# Altium PCB MB1364.PcbDoc (part 1 of 3)
Units mm, origin at the board's own origin, x right, y up, seen from the top; angles counter-clockwise.
Board outline 70 x 133.34 mm, 6 copper layers (Top Layer, Signal Layer 1, Signal Layer 2, Signal Layer 3, Signal Layer 4, Bottom Layer), stack 1.57 mm thick; 66 components, 167 nets, 440 pads, 46 vias.
Unrouted connection lines stored in the file: 1.
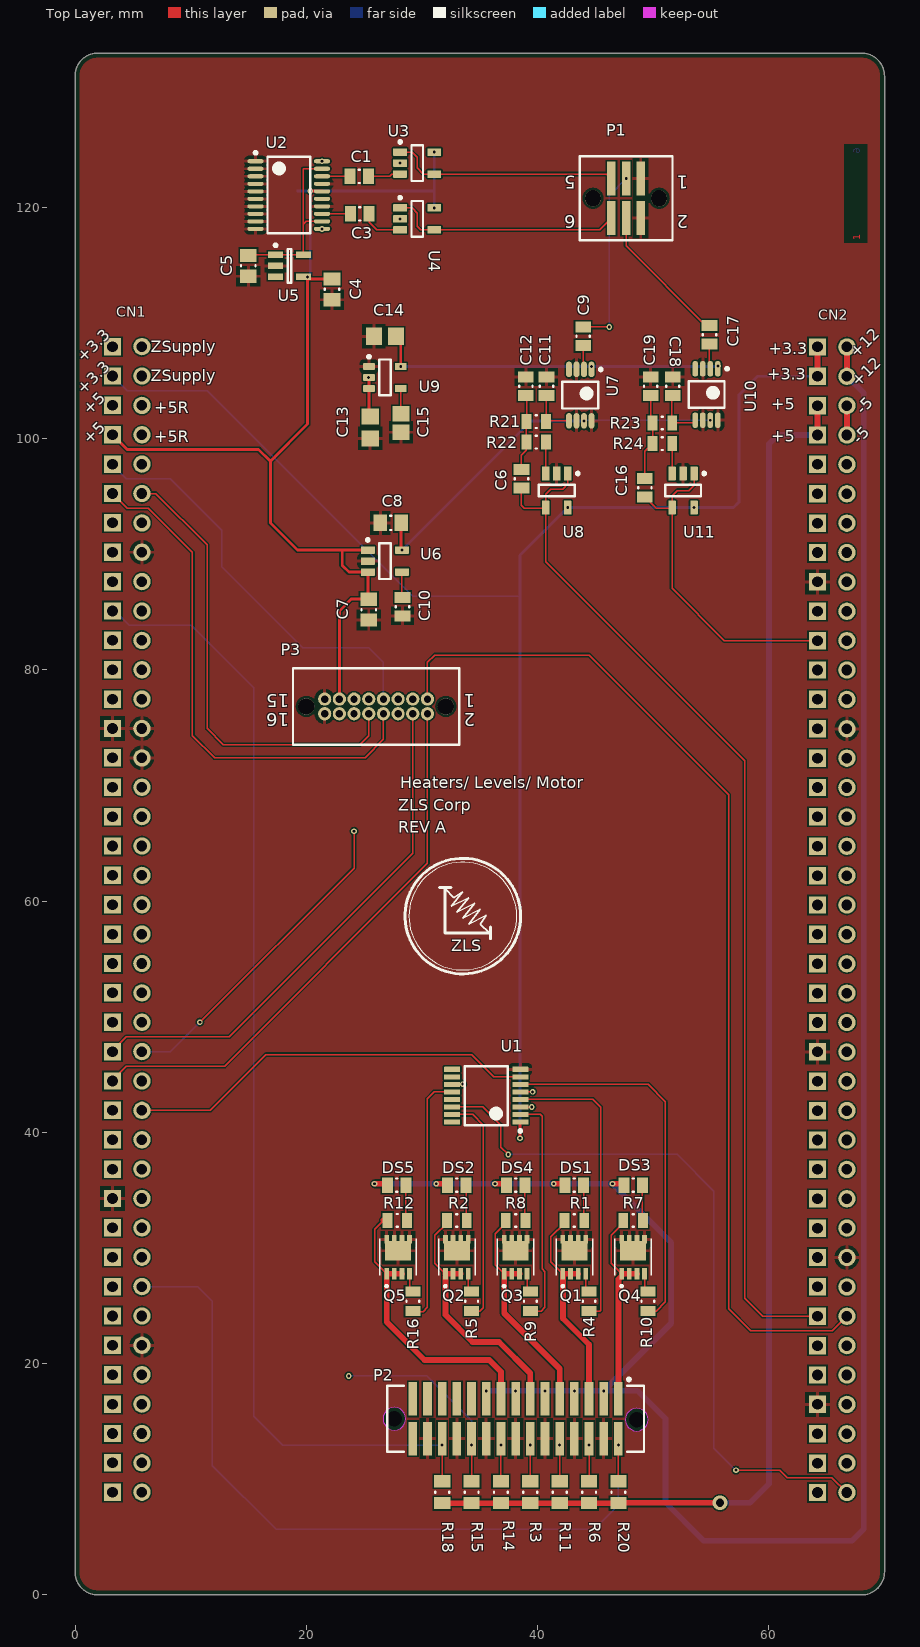
[diagram p0: Top Layer view]
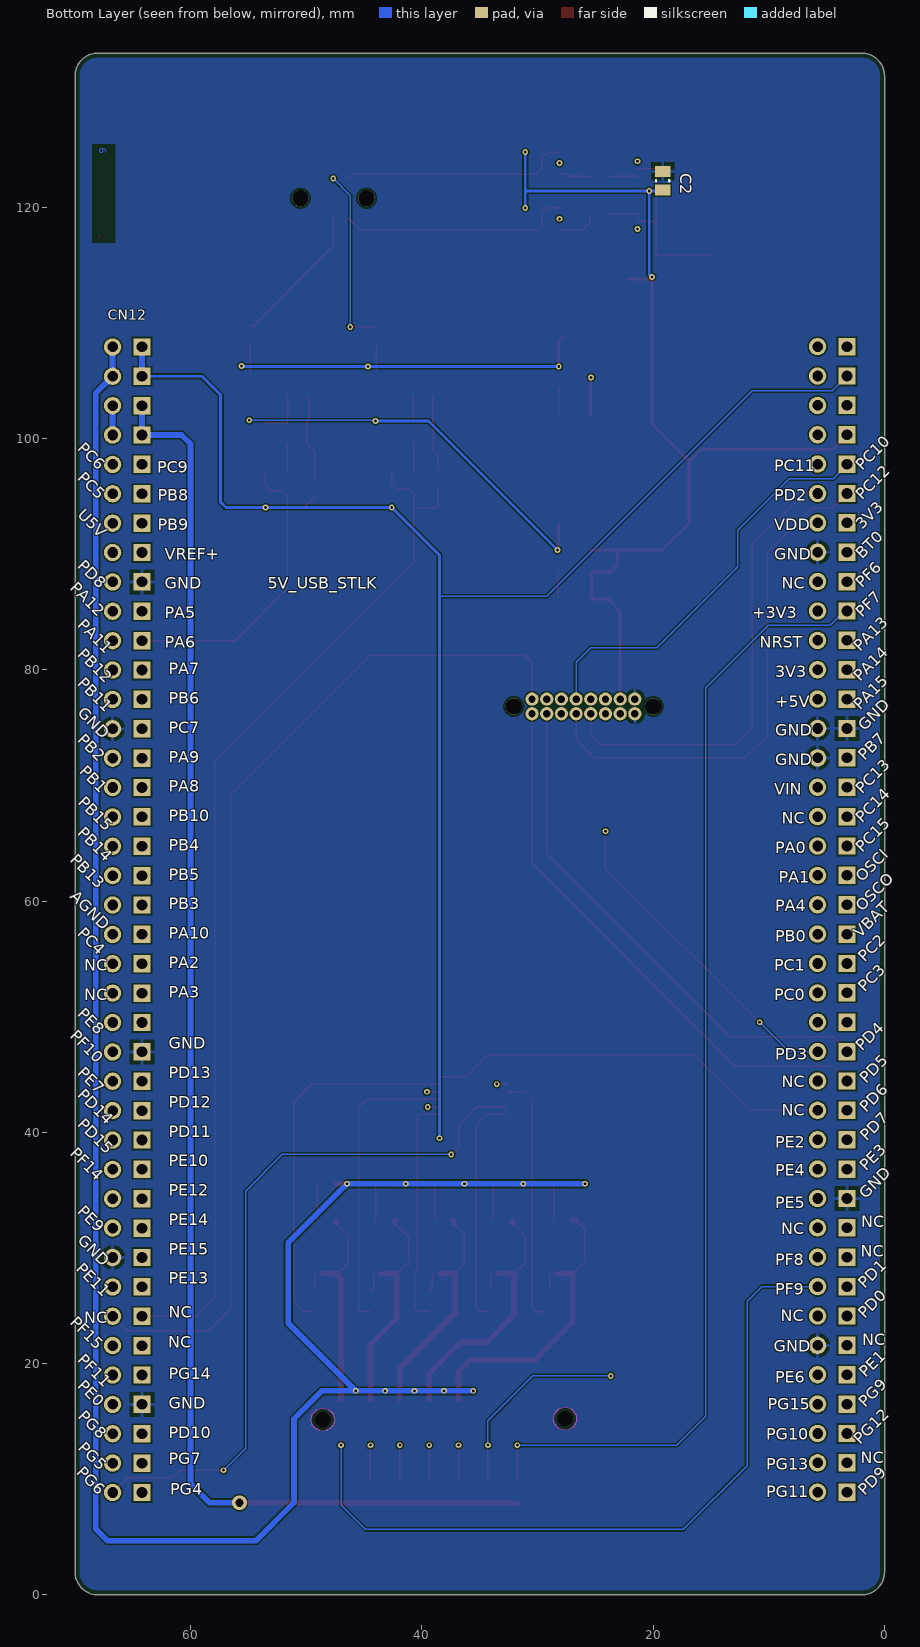
[diagram p1: Bottom Layer view, seen from below]
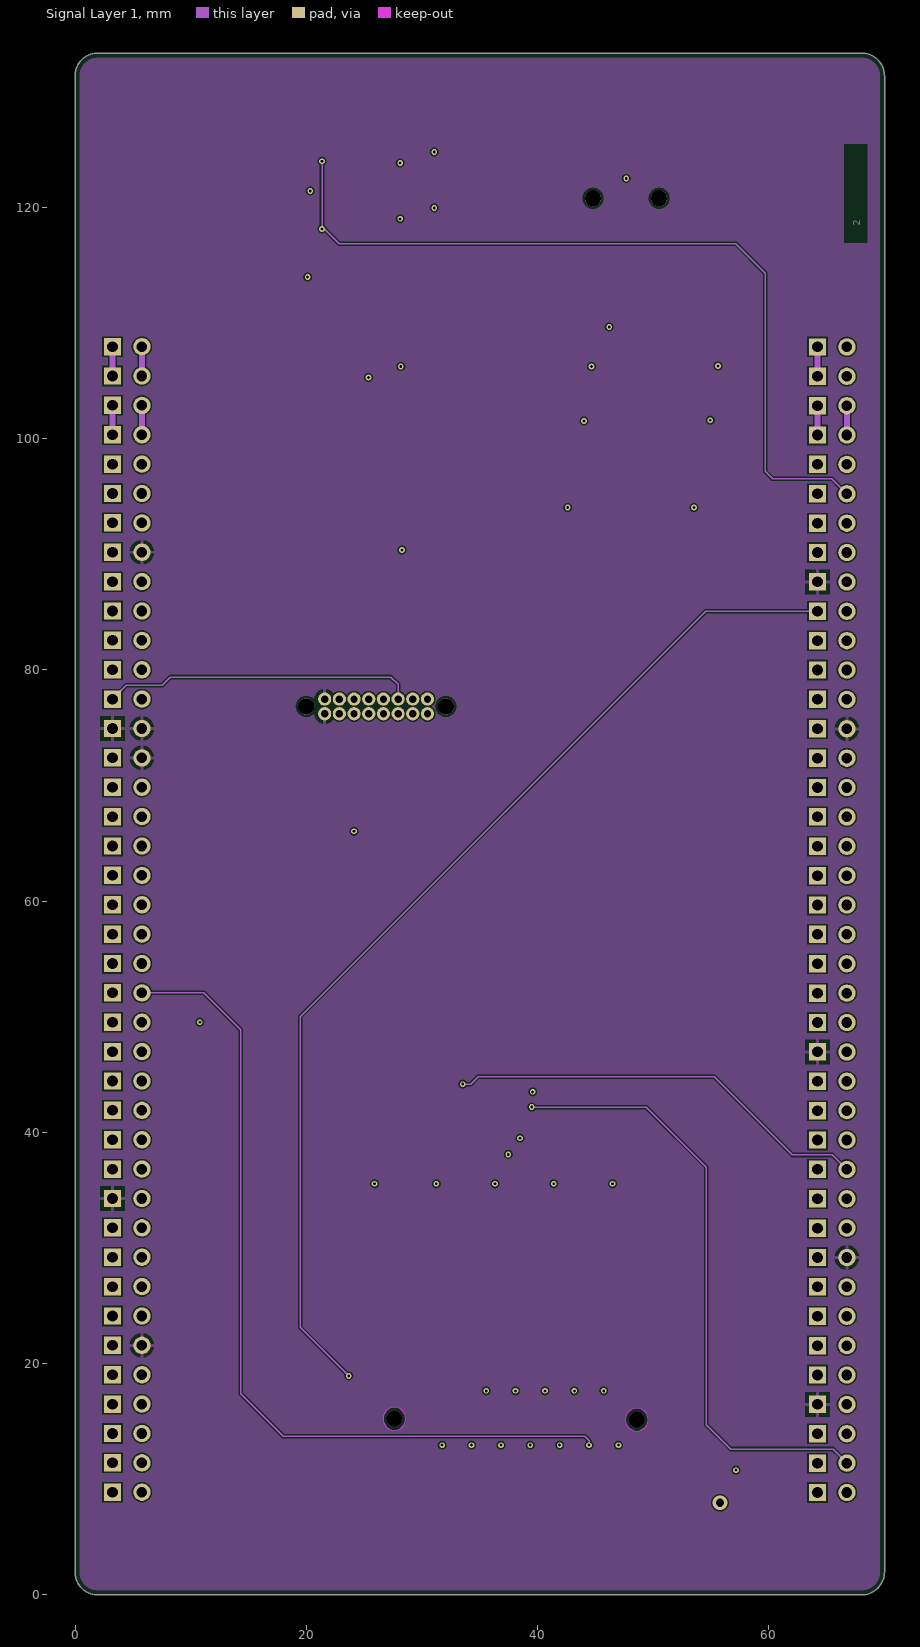
[diagram p2: Signal Layer 1]
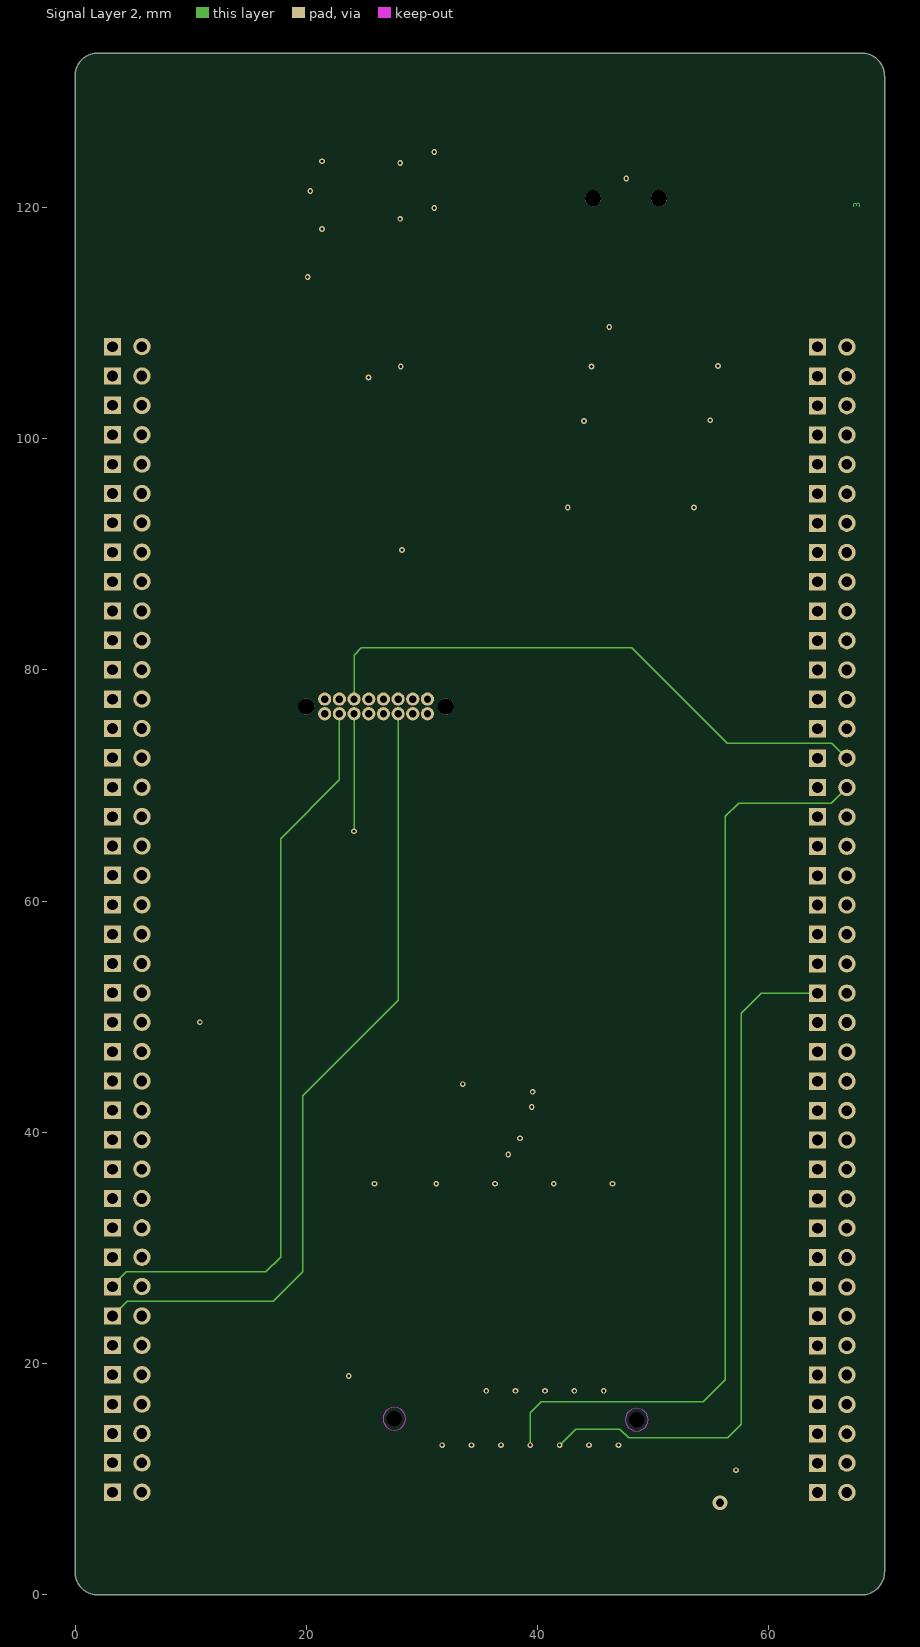
[diagram p3: Signal Layer 2]
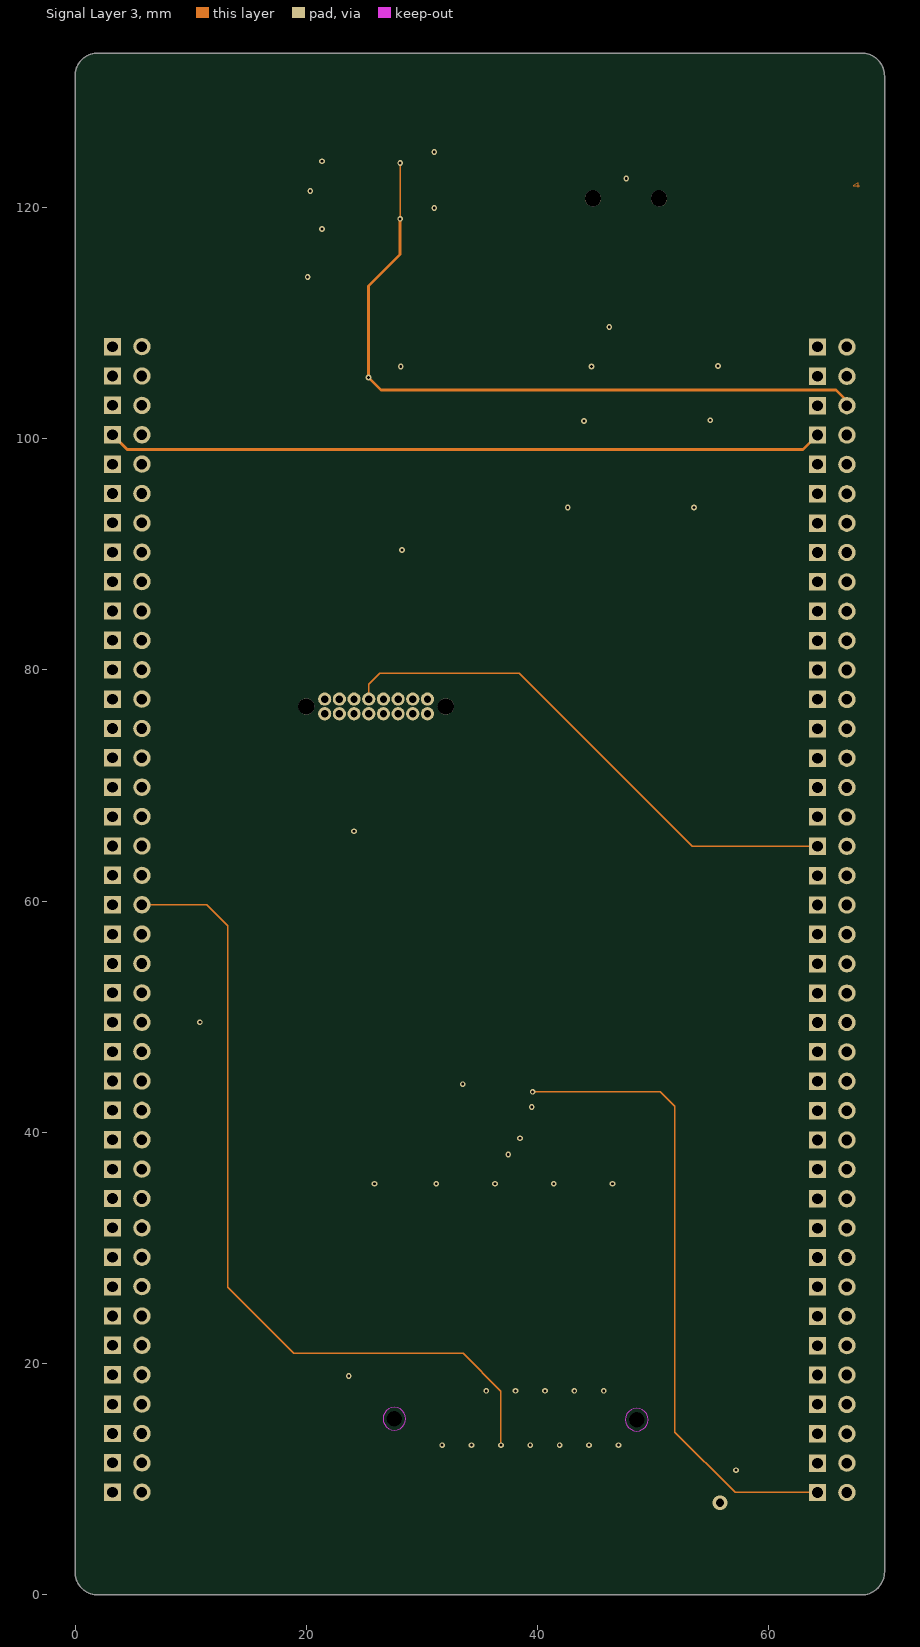
[diagram p4: Signal Layer 3]
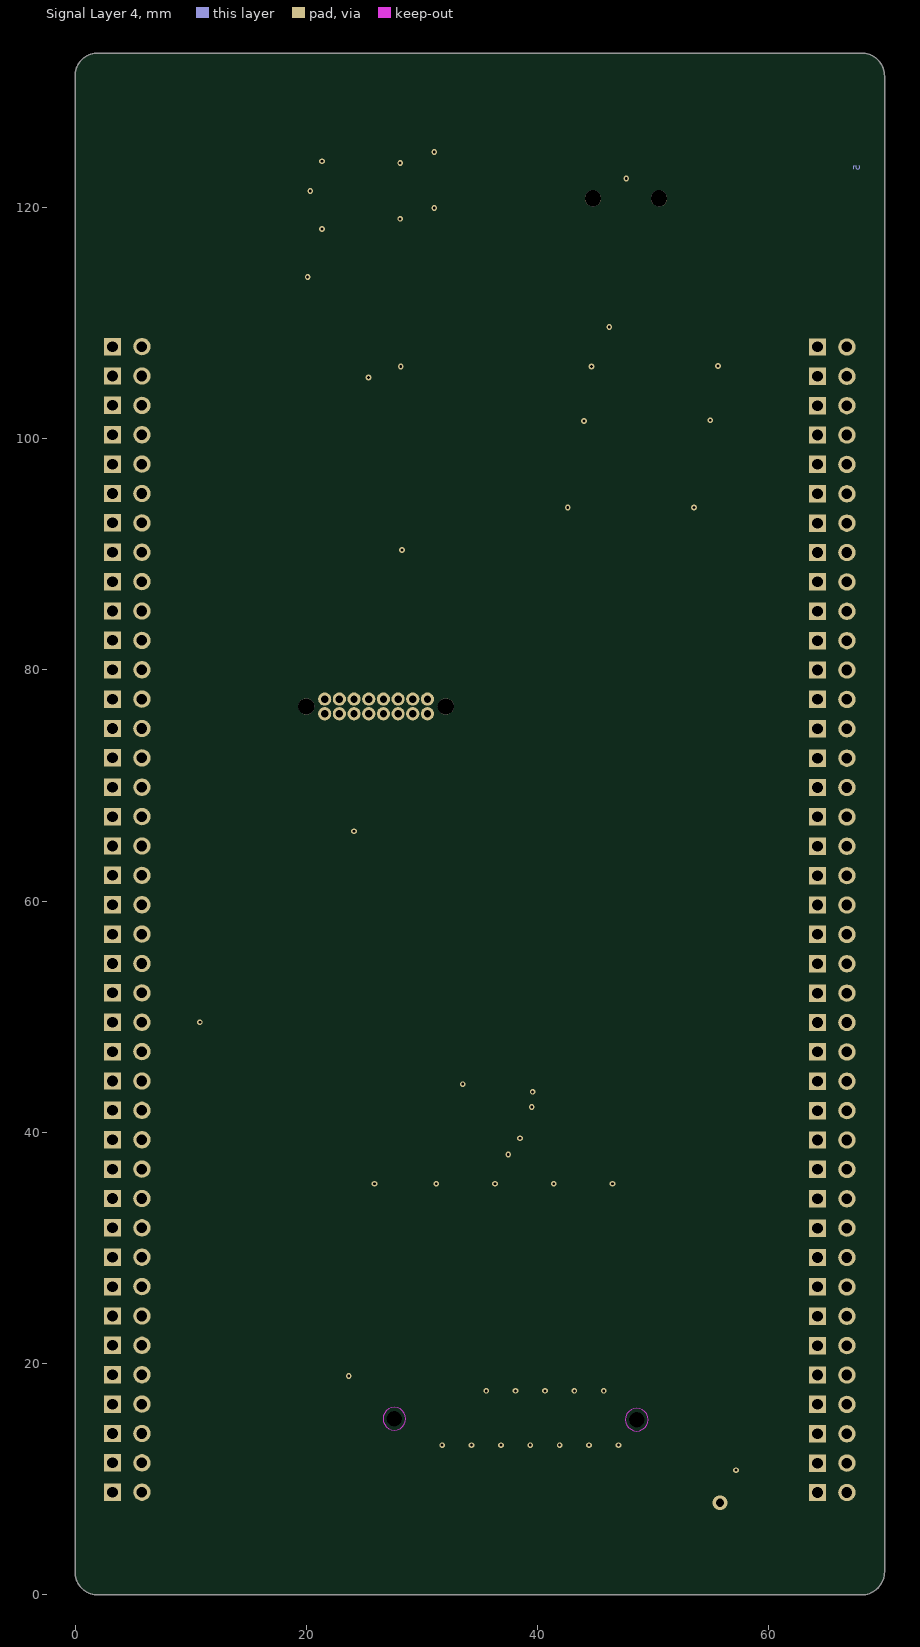
[diagram p5: Signal Layer 4]

## Layer stack, top to bottom
Top Solder: solder mask 0.015, Solder Resist, Dk 3.5
Top Layer: signal copper 0.042
Dielectric 1: prepreg 0.0991, FR-4, Dk 4.2
Signal Layer 1: signal copper 0.0348
Dielectric 2: core 0.1016, Dk 4.2
Signal Layer 2: signal copper 0.0348
Dielectric 3: prepreg 0.9457, Dk 4.2
Signal Layer 3: signal copper 0.0348
Dielectric 4: core 0.1016, Dk 4.2
Signal Layer 4: signal copper 0.0348
Dielectric 5: prepreg 0.0991, Dk 4.2
Bottom Layer: signal copper 0.042
Bottom Solder: solder mask 0.015, Solder Resist, Dk 3.5

## Board outline
0,2 ccw(c2,2) 2,0 37.369,0 51.369,0 68,0 ccw(c68,2) 70,2 70,131.34 ccw(c68,131.34) 68,133.34 2,133.34 ccw(c2,131.34) 0,131.34

## Design rules (kind name [scope] priority, off if disabled: settings)
BoardOutlineClearance [All] p1: gap=0.4 ignorepadtopadclearanceinfootprint=FALSE
Clearance Clearance_RMII_SINGLE_50R [InNetClass('NC_RMII_SINGLE_50R')] p1: gap=0.12 ignorepadtopadclearanceinfootprint=TRUE except(0.2: Arc-Hole Track-Hole SMDPad-SMDPad SMDPad-THPad SMDPad-Hole THPad-THPad THPad-Hole Via-Via Via-Hole Fill-Hole Poly-Hole Region-Hole Text-Hole; 0.3: Arc-Fill Arc-Poly Track-Track Track-Fill Track-Poly SMDPad-Fill SMDPad-Poly THPad-Fill THPad-Poly Via-Fill Via-Poly Fill-Fill Fill-Poly Poly-Poly)
Clearance Clearance_VCP_ISO300 [InNetClass('NC_VCP_ISO300')] p2: gap=0.12 ignorepadtopadclearanceinfootprint=TRUE except(0.2: Arc-Hole Track-Hole SMDPad-SMDPad SMDPad-THPad SMDPad-Hole THPad-THPad THPad-Hole Via-Via Via-Hole Fill-Hole Poly-Hole Region-Hole Text-Hole; 0.3: Arc-Fill Arc-Poly Track-Track Track-Fill Track-Poly SMDPad-Fill SMDPad-Poly THPad-Fill THPad-Poly Via-Fill Via-Poly Fill-Fill Fill-Poly Poly-Poly)
Clearance Clearance_USB_DIFF_90R [InNetClass('NC_USB_DIFF_90R')] p3: gap=0.12 ignorepadtopadclearanceinfootprint=TRUE except(0.2: Arc-Hole Track-Hole SMDPad-SMDPad SMDPad-THPad SMDPad-Hole THPad-THPad THPad-Hole Via-Via Via-Hole Fill-Hole Poly-Hole Region-Hole Text-Hole; 0.3: Arc-Fill Arc-Poly Track-Fill Track-Poly SMDPad-Fill SMDPad-Poly THPad-Fill THPad-Poly Via-Fill Via-Poly Fill-Fill Fill-Poly Poly-Poly)
Clearance Clearance_USB_DIFF_90R_OPTION [InNetClass('NC_USB_DIFF_90R_OPTION') vs OnLayer('Top Layer')] p4: gap=0.12 ignorepadtopadclearanceinfootprint=TRUE except(0.2: Arc-Hole Track-Hole SMDPad-SMDPad SMDPad-THPad SMDPad-Hole THPad-THPad THPad-Hole Via-Via Via-Hole Fill-Hole Poly-Hole Region-Hole Text-Hole; 0.226: Track-Track; 0.3: Arc-Fill Arc-Poly Track-Fill Track-Poly SMDPad-Fill SMDPad-Poly THPad-Fill THPad-Poly Via-Fill Via-Poly Fill-Fill Fill-Poly Poly-Poly)
Clearance Clearance_USB_DIFF_90R_OPTION_L3 [InNetClass('NC_USB_DIFF_90R_OPTION') vs OnLayer('Signal Layer 2')] p5: gap=0.12 ignorepadtopadclearanceinfootprint=TRUE except(0.17: Track-Track; 0.2: Arc-Hole Track-Hole SMDPad-SMDPad SMDPad-THPad SMDPad-Hole THPad-THPad THPad-Hole Via-Via Via-Hole Fill-Hole Poly-Hole Region-Hole Text-Hole; 0.3: Arc-Fill Arc-Poly Track-Fill Track-Poly SMDPad-Fill SMDPad-Poly THPad-Fill THPad-Poly Via-Fill Via-Poly Fill-Fill Fill-Poly Poly-Poly)
Clearance Clearance_RXTX_DIFF_100R [InNetClass('NC_RXTX_DIFF_100R')] p6: gap=0.12 ignorepadtopadclearanceinfootprint=TRUE except(0.2: Arc-Hole Track-Hole SMDPad-SMDPad SMDPad-THPad SMDPad-Hole THPad-THPad THPad-Hole Via-Via Via-Hole Fill-Hole Poly-Hole Region-Hole Text-Hole; 0.3: Arc-Fill Arc-Poly Track-Fill Track-Poly SMDPad-Fill SMDPad-Poly THPad-Fill THPad-Poly Via-Fill Via-Poly Fill-Fill Fill-Poly Poly-Poly)
Clearance Clearance_STLK_ISO200 [InNetClass('NC_STLK_W200-ISO200')] p7: gap=0.12 ignorepadtopadclearanceinfootprint=TRUE except(0.2: Arc-Poly Arc-Hole Track-Track Track-Poly Track-Hole SMDPad-SMDPad SMDPad-THPad SMDPad-Poly SMDPad-Hole THPad-THPad THPad-Poly THPad-Hole Via-Via Via-Poly Via-Hole Fill-Poly Fill-Hole Poly-Poly Poly-Hole Region-Hole Text-Hole; 0.3: Arc-Fill Track-Fill SMDPad-Fill THPad-Fill Via-Fill Fill-Fill)
Clearance [All] p8: gap=0.12 ignorepadtopadclearanceinfootprint=TRUE except(0.2: Arc-Hole Track-Hole SMDPad-SMDPad SMDPad-THPad SMDPad-Hole THPad-THPad THPad-Hole Via-Via Via-Hole Fill-Hole Poly-Hole Region-Hole Text-Hole; 0.3: Arc-Fill Track-Fill SMDPad-Fill THPad-Fill Via-Fill Fill-Fill)
ComponentClearance [All] p1: gap=0 collisioncheckmode=3 verticalgap=0 showdistances=FALSE
DiffPairsRouting DiffPairsRouting_USB_90R [InDifferentialPairClass('DPC_USB_DIFF_90R')] p1: maxlimit=0.252 minlimit=0.226 mostfreqgap=0.226 toplayer_mingap=0.226 toplayer_maxgap=0.226 toplayer_minwidth=0.155 toplayer_maxwidth=0.155 toplayer_prefwidth=0.155 midlayer1_mingap=0.226 midlayer1_maxgap=0.226 midlayer1_minwidth=0.155 midlayer1_maxwidth=0.155 midlayer1_prefwidth=0.155 midlayer2_mingap=0.252 midlayer2_prefgap=0.252 midlayer2_minwidth=0.13 midlayer2_maxwidth=0.13 midlayer2_prefwidth=0.13 midlayer3_maxgap=0.226 midlayer3_prefgap=0.226 midlayer3_minwidth=0.155 midlayer3_maxwidth=0.155 midlayer3_prefwidth=0.155 midlayer4_mingap=0.226 midlayer4_maxgap=0.226 midlayer4_minwidth=0.155 midlayer4_maxwidth=0.155 midlayer4_prefwidth=0.155 bottomlayer_mingap=0.226 bottomlayer_maxgap=0.226 bottomlayer_minwidth=0.155 bottomlayer_maxwidth=0.155 bottomlayer_prefwidth=0.155 maxuncoupledlength=12.7
DiffPairsRouting DiffPairsRouting_RXTX_100R [InDifferentialPairClass('DPC_RXTX_DIFF_100R')] p2: maxlimit=0.277 minlimit=0.252 mostfreqgap=0.277 toplayer_maxgap=0.252 toplayer_prefgap=0.252 toplayer_minwidth=0.11 toplayer_maxwidth=0.13 toplayer_prefwidth=0.13 midlayer1_maxgap=0.252 midlayer1_prefgap=0.252 midlayer1_minwidth=0.13 midlayer1_maxwidth=0.13 midlayer1_prefwidth=0.13 midlayer2_mingap=0.277 midlayer2_minwidth=0.104 midlayer2_maxwidth=0.104 midlayer2_prefwidth=0.104 midlayer3_maxgap=0.252 midlayer3_prefgap=0.252 midlayer3_minwidth=0.13 midlayer3_maxwidth=0.13 midlayer3_prefwidth=0.13 midlayer4_maxgap=0.252 midlayer4_prefgap=0.252 midlayer4_minwidth=0.13 midlayer4_maxwidth=0.13 midlayer4_prefwidth=0.13 bottomlayer_maxgap=0.252 bottomlayer_prefgap=0.252 bottomlayer_minwidth=0.11 bottomlayer_maxwidth=0.13 bottomlayer_prefwidth=0.13 maxuncoupledlength=12.7
FabricationTestPointUsage TestPointUsage [All] p1: valid=0 allowmultiple=FALSE
FabricationTestpoint Testpoint [(IsPad And (OnTopLayer Or OnBottomLayer))] p1: side=3 testpointundercomponent=TRUE minsize=1.016 maxsize=2.54 preferedsize=1.524 minholesize=0 maxholesize=1.016 preferedholesize=0.813 testpointgrid=0.025 allowsidetop=TRUE allowsidebottom=TRUE usegrid=TRUE gridtolerance=0
HoleSize [All] p1: absolutevalues=TRUE maxlimit=3.81 minlimit=0.025 maxpercent=80.000 minpercent=20.000
MinimumSolderMaskSliver [All] p1: minsoldermaskwidth=0
PolygonConnect PolygonConnect_10 [All vs IsNamedPolygon('USB_FS_VBUS_L01_P068')] p1: connectstyle=Direct reliefconductorwidth=0.254 reliefentries=4 polygonreliefangle="90 Angle" airgapwidth=0.254
PolygonConnect PolygonConnect_9 [All vs IsNamedPolygon('5V_L03_P060')] p2: connectstyle=Direct reliefconductorwidth=0.254 reliefentries=4 polygonreliefangle="90 Angle" airgapwidth=0.254
PolygonConnect PolygonConnect_8 [All vs IsNamedPolygon('5V_L01_P058')] p3: connectstyle=Direct reliefconductorwidth=0.254 reliefentries=4 polygonreliefangle="90 Angle" airgapwidth=0.254
PolygonConnect PolygonConnect_7 [All vs IsNamedPolygon('3V3_STLK_L04_P042')] p4: connectstyle=Direct reliefconductorwidth=0.254 reliefentries=4 polygonreliefangle="90 Angle" airgapwidth=0.254
PolygonConnect PolygonConnect_6 [All vs IsNamedPolygon('5V_USB_CHGR_L04_P040')] p5: connectstyle=Direct reliefconductorwidth=0.254 reliefentries=4 polygonreliefangle="90 Angle" airgapwidth=0.254
PolygonConnect PolygonConnect_5 [All vs IsNamedPolygon('5V_L01_P038')] p6: connectstyle=Direct reliefconductorwidth=0.254 reliefentries=4 polygonreliefangle="90 Angle" airgapwidth=0.254
PolygonConnect PolygonConnect_4 [All vs IsNamedPolygon('5V_L01_P038')] p7: thpad.connectstyle=Relief thpad.reliefconductorwidth=0.4 thpad.reliefentries=4 thpad.polygonreliefangle="90 Angle" thpad.airgapwidth=0.4 smdpad.connectstyle=Direct smdpad.reliefconductorwidth=0.254 smdpad.reliefentries=4 smdpad.polygonreliefangle="90 Angle" smdpad.airgapwidth=0.254 via.connectstyle=Direct via.reliefconductorwidth=0.254 via.reliefentries=4 via.polygonreliefangle="90 Angle" via.airgapwidth=0.254
PolygonConnect PolygonConnect_3 [All vs IsNamedPolygon('5V_VIN_L01_P028')] p8: connectstyle=Direct reliefconductorwidth=0.254 reliefentries=4 polygonreliefangle="90 Angle" airgapwidth=0.254
PolygonConnect PolygonConnect_2 [All vs IsNamedPolygon('3V3_L01_P026')] p9: connectstyle=Direct reliefconductorwidth=0.254 reliefentries=4 polygonreliefangle="90 Angle" airgapwidth=0.254
PolygonConnect PolygonConnect_1 [All vs IsNamedPolygon('GND_L01_P024')] p10: connectstyle=Direct reliefconductorwidth=0.254 reliefentries=4 polygonreliefangle="90 Angle" airgapwidth=0.254
PolygonConnect [All] p11: thpad.connectstyle=Relief thpad.reliefconductorwidth=0.3 thpad.reliefentries=4 thpad.polygonreliefangle="90 Angle" thpad.airgapwidth=0.3 smdpad.connectstyle=Relief smdpad.reliefconductorwidth=0.3 smdpad.reliefentries=4 smdpad.polygonreliefangle="90 Angle" smdpad.airgapwidth=0.3 via.connectstyle=Direct via.reliefconductorwidth=0.254 via.reliefentries=4 via.polygonreliefangle="90 Angle" via.airgapwidth=0.254
RoutingLayers RoutingLayers_USB_DIFF_90R [InDifferentialPairClass('DPC_USB_DIFF_90R')] p1: top layer_v5=TRUE mid layer 1_v5=TRUE mid layer 2_v5=TRUE mid layer 3_v5=TRUE mid layer 4_v5=TRUE bottom layer_v5=TRUE
RoutingLayers RoutingLayers_RXTX_DIFF_100R [InDifferentialPairClass('DPC_RXTX_DIFF_100R')] p2: top layer_v5=TRUE mid layer 1_v5=TRUE mid layer 2_v5=TRUE mid layer 3_v5=TRUE mid layer 4_v5=TRUE bottom layer_v5=TRUE
RoutingLayers RoutingLayers_RMII_SINGLE_50R [InNetClass('NC_RMII_SINGLE_50R')] p3: top layer_v5=TRUE mid layer 1_v5=TRUE mid layer 2_v5=TRUE mid layer 3_v5=TRUE mid layer 4_v5=TRUE bottom layer_v5=TRUE
RoutingVias RoutingVias_Default [All] p1: holewidth=0.2 width=0.45 viastyle="Through Hole" minholewidth=0.2 minwidth=0.45 maxholewidth=0.2 maxwidth=0.45
SilkToSilkClearance [All] p1: silktosilkclearance=0.102
SilkToSolderMaskClearance SilkscreenOverComponentPads [IsPad] p1: minsilkscreentomaskgap=0.102 clearancetoexposedcopper=TRUE
SolderMaskExpansion [All] p1: expansion=0.102
Width Width_RMII_SINGLE_50R [InNetClass('NC_RMII_SINGLE_50R')] p1: maxlimit=0.127 minlimit=0.102 preferedwidth=0.127 toplayer_minwidth=0.127 midlayer1_minwidth=0.127 midlayer2_maxwidth=0.102 midlayer2_prefwidth=0.102 midlayer3_minwidth=0.127 midlayer4_minwidth=0.127 bottomlayer_minwidth=0.127 minimp=50.000000 maximp=50.000000 favimp=50.000000
Width Width_POWER_300u [InNetClass('NC_POWER_300u')] p2: maxlimit=10 minlimit=0.12 preferedwidth=0.3 minimp=50.000000 maximp=50.000000 favimp=50.000000
Width Width_GROUND [InNetClass('NC_GROUND')] p3: maxlimit=10 minlimit=0.12 preferedwidth=0.3 minimp=50.000000 maximp=50.000000 favimp=50.000000
Width Width_POWER_500u [InNetClass('NC_POWER_500u')] p4: maxlimit=10 minlimit=0.12 preferedwidth=0.5 minimp=50.000000 maximp=50.000000 favimp=50.000000
Width Width_POWER_SMPS [InNetClass('NC_POWER_SMPS')] p5: maxlimit=10 minlimit=0.12 preferedwidth=0.5 minimp=50.000000 maximp=50.000000 favimp=50.000000
Width Width_STLK_W200 [InNetClass('NC_STLK_W200-ISO200')] p6: maxlimit=10 minlimit=0.2 preferedwidth=0.2 minimp=50.000000 maximp=50.000000 favimp=50.000000
Width Width_USB_OPTION [InNetClass('NC_USB_DIFF_90R_OPTION')] p7: maxlimit=0.155 minlimit=0.13 preferedwidth=0.155 toplayer_minwidth=0.155 midlayer1_minwidth=0.155 midlayer2_maxwidth=0.13 midlayer2_prefwidth=0.13 midlayer3_minwidth=0.155 midlayer4_minwidth=0.155 bottomlayer_minwidth=0.155 minimp=50.000000 maximp=50.000000 favimp=50.000000
Width [All] p8: maxlimit=10 minlimit=0.12 preferedwidth=0.12 minimp=50.000000 maximp=50.000000 favimp=50.000000
Width Width_RD_N [InNet('RD_N')] p9: maxlimit=10 minlimit=0.11 preferedwidth=0.12 toplayer_maxwidth=0.11 toplayer_prefwidth=0.11 midlayer1_minwidth=0.12 midlayer2_minwidth=0.12 midlayer3_minwidth=0.12 midlayer4_minwidth=0.12 bottomlayer_maxwidth=0.11 bottomlayer_prefwidth=0.11 minimp=50.000000 maximp=50.000000 favimp=50.000000
Width Width_TD_P [InNet('TD_P')] p10: maxlimit=10 minlimit=0.11 preferedwidth=0.12 toplayer_maxwidth=0.11 toplayer_prefwidth=0.11 midlayer1_minwidth=0.12 midlayer2_minwidth=0.12 midlayer3_minwidth=0.12 midlayer4_minwidth=0.12 bottomlayer_maxwidth=0.11 bottomlayer_prefwidth=0.11 minimp=50.000000 maximp=50.000000 favimp=50.000000
21 further rules are at their usual default settings.

## Classes and differential pairs
component class Heaters: DS1 DS2 DS3 DS4 DS5 P2 Q1 Q2 Q3 Q4 Q5 R1 R2 R3 R4 R5 R6 R7 R8 R9 R10 R11 R12 R14 R15 R16 R18 R20 U1
component class Connectors: CN1 CN2 HW1 HW2 P1 P3
component class Levels: C1 C2 C3 C4 C5 C6 C7 C8 C9 C10 C11 C12 C13 C14 C15 C16 C17 C18 C19 R21 R22 R23 R24 U2 U3 U4 U5 U6 U7 U8 U9 U10 U11

## Components (designator, comment, footprint, x,y, rotation, side; value= is the part's Value field where it differs from the comment)
C1 "470nF" CAPC0805(2012)75_L 24.562,122.682 r0 top value=.47uF
C2 ".1uF" CAPC0805(2012)75_L 19.177,122.301 r270 bottom
C3 "470nF" CAPC0805(2012)75_L 24.638,119.431 r0 top value=.47uF
C4 "08053C105JAT2A" CAPC0805(2012)145_N 22.225,112.903 r90 top value=1uF
C5 "08053C105JAT2A" CAPC0805(2012)145_N 14.986,114.935 r90 top value=1uF
C6 "2.2uF" CAPC0805(2012)75_L 38.608,96.52 r90 top value=1uF
C7 "08053C105JAT2A" CAPC0805(2012)145_N 25.4,85.217 r90 top value=1uF
C8 "08053C105JAT2A" CAPC0805(2012)145_N 27.305,92.71 r0 top value=1uF
C9 "470nF" CAPC0805(2012)75_L 43.942,108.832 r270 top value=.47uF
C10 ".1uF" CAPC0805(2012)75_L 28.321,85.471 r90 top
C11 "2.2uF" CAPC0805(2012)75_L 40.767,104.521 r270 top value=1uF
C12 ".22uF" CAPC0805(2012)75_L 38.989,104.521 r270 top value=1uF
C13 "GRM21BR71A225KA01L" CAPC2013X135X50ML10T20 25.527,100.965 r90 top
C14 "GRM21BR71A225KA01L" CAPC2013X135X50ML10T20 26.797,108.839 r0 top
C15 "0805ZC103KAT2A" CAPC2013X140X50NL20T25 28.194,101.346 r90 top
C16 "2.2uF" CAPC0805(2012)75_L 49.276,95.758 r90 top value=1uF
C17 "470nF" CAPC0805(2012)75_L 54.864,108.966 r270 top value=.47uF
C18 "2.2uF" CAPC0805(2012)75_L 51.689,104.521 r270 top value=1uF
C19 ".22uF" CAPC0805(2012)75_L 49.784,104.521 r270 top value=1uF
CN1 "SSW-140-23-G-D" SSW-140-23-G-D 4.516,58.419 r270 top locked
CN2 "SSW-140-23-G-D" SSW-140-23-G-D 65.476,58.394 r270 top locked
DS1 "Visible Name Value Type    False Description Lite-On LTST-S220KRKT Red LED, 631 nm 2012 (0805) Side View, Rectangle Lens SMD package STRING" 0805C_L 43.18,35.433 r0 top
DS2 "Visible Name Value Type    False Description Lite-On LTST-S220KRKT Red LED, 631 nm 2012 (0805) Side View, Rectangle Lens SMD package STRING" 0805C_L 33.02,35.433 r0 top
DS3 "Visible Name Value Type    False Description Lite-On LTST-S220KRKT Red LED, 631 nm 2012 (0805) Side View, Rectangle Lens SMD package STRING" 0805C_L 48.26,35.433 r0 top
DS4 "Visible Name Value Type    False Description Lite-On LTST-S220KRKT Red LED, 631 nm 2012 (0805) Side View, Rectangle Lens SMD package STRING" 0805C_L 38.1,35.433 r0 top
DS5 "Visible Name Value Type    False Description Lite-On LTST-S220KRKT Red LED, 631 nm 2012 (0805) Side View, Rectangle Lens SMD package STRING" 0805C_L 27.813,35.433 r0 top
P1 "SAMTEC-TFM-103-02-X-D-AJ" SAMTEC-TFM-103-02-X-D-A 47.65,120.777 r180 top locked
P2 "TFM-115-02-S-D-A" "TFM-115-02-S-D-A - duplicate" 38.1,15.24 r180 top locked
P3 "SAMTEC-TFM-108-01-X-D-AJ" SAMTEC-TFM-108-01-X-D-A 26.035,76.835 r180 top locked
Q1 "SI7611DN-T1-GE3" *VISHAY_SIS468DN-T1-GE3 43.18,29.21 r90 top
Q2 "SI7611DN-T1-GE3" *VISHAY_SIS468DN-T1-GE3 33.02,29.21 r90 top
Q3 "SI7611DN-T1-GE3" *VISHAY_SIS468DN-T1-GE3 38.1,29.21 r90 top
Q4 "SI7611DN-T1-GE3" *VISHAY_SIS468DN-T1-GE3 48.26,29.21 r90 top
Q5 "SI7611DN-T1-GE3" *VISHAY_SIS468DN-T1-GE3 27.94,29.21 r90 top
R1 "" RESC0805(2012)_L 43.18,32.385 r0 top
R2 "" RESC0805(2012)_L 33.02,32.385 r180 top
R3 "6K98 1% 0805(2012)" RESC0805(2012)_N 39.37,8.89 r270 top
R4 "" RESC0805(2012)_L 44.45,25.4 r90 top
R5 "" RESC0805(2012)_L 34.29,25.4 r90 top
R6 "6K98 1% 0805(2012)" RESC0805(2012)_N 44.45,8.89 r270 top
R7 "" RESC0805(2012)_L 48.26,32.385 r0 top
R8 "" RESC0805(2012)_L 38.1,32.385 r180 top
R9 "" RESC0805(2012)_L 39.37,25.4 r90 top
R10 "" RESC0805(2012)_L 49.53,25.4 r90 top
R11 "6K98 1% 0805(2012)" RESC0805(2012)_N 41.91,8.89 r90 top
R12 "" RESC0805(2012)_L 27.86,32.4 r0 top
R14 "6K98 1% 0805(2012)" RESC0805(2012)_N 36.83,8.89 r90 top
R15 "6K98 1% 0805(2012)" RESC0805(2012)_N 34.29,8.89 r270 top
R16 "" RESC0805(2012)_L 29.21,25.4 r90 top
R18 "6K98 1% 0805(2012)" RESC0805(2012)_N 31.75,8.89 r90 top
R20 "6K98 1% 0805(2012)" RESC0805(2012)_N 46.99,8.89 r90 top
R21 "100k" RESC0805(2012)_L 39.878,101.466 r0 top
R22 "100k" RESC0805(2012)_L 39.878,99.688 r180 top
R23 "100k" RESC0805(2012)_L 50.8,101.346 r0 top
R24 "100k" RESC0805(2012)_L 50.8,99.568 r180 top
U1 "CD74HC4050PWR" PW0016A_N 35.56,43.18 r180 top
U2 "MAX333CWP+" TSOP65P640X90-20N 18.491,121.056 r0 top
U3 "OPA188AIDBVR" DBV0005A_M 29.591,123.825 r0 top
U4 "OPA188AIDBVR" DBV0005A_M 29.591,118.999 r0 top
U5 "LT6650CS5#TRMPBF" LT-S5-5-TSOT-23_N 18.542,114.935 r0 top
U6 "LP3985IM5-2.5/NOPB" DBV0005A_M 26.797,89.408 r0 top
U7 "LTC1967" LTC1967 43.688,103.752 r270 top
U8 "OPA188AIDBVR" DBV0005A_M 41.656,95.504 r270 top
U9 "TPS72325DBVR" DBV0005A_N 26.797,105.283 r0 top
U10 "LTC1967" LTC1967 54.61,103.81 r270 top
U11 "OPA188AIDBVR" DBV0005A_M 52.578,95.504 r270 top

## Footprints (in the part's own frame and the unit in brackets; to place one, negate y for a bottom-side part, rotate by r counter-clockwise, add the part's x,y. Pads: shape width x height; smd on the part's side, far side on the other; paste and mask are expansions set on the pad)
0805C_L [mm]
  rect 0.95x1.35 smd: 1(-0.8,0) 2(0.8,0)
  silkscreen extent -0.05,-0.58 0.05,0.58, body extent -1.1,-0.72 1.1,0.72, height 0.75
*VISHAY_SIS468DN-T1-GE3 [mm]
  rect 0.99x0.405 smd: 1(-1.435,0.99) 2(-1.435,0.33) 3(-1.435,-0.33) 4(-1.435,-0.99)
  rect 0.76x0.405 smd: 5(1.55,-0.99) 6(1.55,-0.33) 7(1.55,0.33) 8(1.55,0.99)
  rect 1.725x2.235 smd: 9(0.557,0)
  silkscreen extent -2.6,-1.57 1.58,1.58
CAPC0805(2012)75_L [mm] "Chip Capacitor, Body 2.0x1.2mm, Height 0.75mm, IPC High Density"
  rect 0.95x1.35 smd: 1(-0.8,0) 2(0.8,0)
  silkscreen extent -0.05,-0.58 0.05,0.58, body extent -1.1,-0.72 1.1,0.72, height 0.75
CAPC0805(2012)145_N [mm] "Chip Capacitor, Body 2.0x1.2mm, Height 1.45mm, IPC Medium Density"
  rect 1.15x1.45 smd: 1(-0.9,0) 2(0.9,0)
  silkscreen extent -0.05,-0.62 0.05,0.63, body extent -1.1,-0.72 1.1,0.73, height 1.45
CAPC2013X135X50ML10T20 [mm] "Chip Capacitor, 2-Leads, Body 2.00x1.25mm, IPC Low Density"
  rect 1.4x1.5 smd: 1(-0.95,0) 2(0.95,0)
  body extent -1.05,-0.67 1.05,0.67, height 1.35
CAPC2013X140X50NL20T25 [mm] "Chip Capacitor, 2-Leads, Body 2.00x1.25mm, IPC Medium Density"
  rect 1.3x1.45 smd: 1(-0.8,0) 2(0.8,0)
  body extent -1.1,-0.72 1.1,0.72, height 1.4
DBV0005A_M [mm] "SOT23, 5-Leads, Body 3.05x1.75mm, Pitch 0.95mm, IPC Low Density"
  rrect15% 1.2x0.65 smd: 1(-1.475,0.95) 2(-1.475,0) 3(-1.475,-0.95) 4(1.475,-0.95) 5(1.475,0.95)
  silkscreen extent -1.6,-1.55 0.5,1.95, body extent -1.42,-1.46 1.42,1.46, height 1.08
DBV0005A_N [mm] "SOT23, 5-Leads, Body 3.05x1.75mm, Pitch 0.95mm, IPC Medium Density"
  rrect17% 1x0.6 smd: 1(-1.375,0.95) 2(-1.375,0) 3(-1.375,-0.95) 4(1.375,-0.95) 5(1.375,0.95)
  silkscreen extent -1.5,-1.55 0.5,1.92, body extent -1.42,-1.46 1.42,1.46, height 1.08
LT-S5-5-TSOT-23_N [mm] "SOT23, 5-Leads, Body 2.90x1.63mm, Pitch 0.95mm, IPC Medium Density"
  rect 1.3x0.55 smd: 1(-1.2,0.95) 2(-1.2,0) 3(-1.2,-0.95) 4(1.2,-0.95) 5(1.2,0.95)
  silkscreen extent -1.32,-1.45 0.15,1.9, body extent -0.87,-1.45 0.87,1.45, height 1
LTC1967 [mm]
  oval 1.35x0.5 smd: 1(-2.225,0.975) 2(-2.225,0.325) 3(-2.225,-0.325) 4(-2.225,-0.975) 5(2.225,-0.975) 6(2.225,-0.325) 7(2.225,0.325) 8(2.225,0.975)
  silkscreen extent -2.35,-1.55 1.15,1.9, body extent -2.45,-1.55 2.45,1.55, height 1.1
PW0016A_N [mm] "SOP, 16-Leads, Body 5.1x4.5mm, Pitch 0.65mm, IPC Medium Density"
  rrect22% 1.4x0.45 smd: 1(-2.95,2.275) 2(-2.95,1.625) 3(-2.95,0.975) 4(-2.95,0.325) 5(-2.95,-0.325) 6(-2.95,-0.975) 7(-2.95,-1.625) 8(-2.95,-2.275) 9(2.95,-2.275) 10(2.95,-1.625) 11(2.95,-0.975) 12(2.95,-0.325) 13(2.95,0.325) 14(2.95,0.975) 15(2.95,1.625) 16(2.95,2.275)
  silkscreen extent -3.08,-2.55 1.85,3.17, body extent -3.21,-2.5 3.21,2.5, height 1
RESC0805(2012)_L [mm] "Chip Resistor, Body 2.0x1.3mm, IPC High Density"
  rect 0.85x1.3 smd: 1(-0.85,0) 2(0.85,0)
  silkscreen extent -0.05,-0.55 0.05,0.55, body extent -1.1,-0.67 1.1,0.68, height 0.7
RESC0805(2012)_N [mm] "Chip Resistor, Body 2.0x1.3mm, IPC Medium Density"
  rect 1.05x1.4 smd: 1(-0.95,0) 2(0.95,0)
  silkscreen extent -0.05,-0.6 0.05,0.6, body extent -1.1,-0.67 1.1,0.68, height 0.7
SAMTEC-TFM-103-02-X-D-A [mm]
  rect 0.74x2.92 smd: 1(-1.27,-1.714) 2(-1.27,1.714) 3(0,-1.714) 4(0,1.714) 5(1.27,-1.714) 6(1.27,1.714)
  round 1.4 hole 1.4: MH1(-2.858,0) MH2(2.858,0)
  silkscreen extent -4.01,-3.63 4.01,3.63
SAMTEC-TFM-108-01-X-D-A [mil]
  round 45 hole 25: 1(-175,-25) 2(-175,25) 3(-125,-25) 4(-125,25) 5(-75,-25) 6(-75,25) 7(-25,-25) 8(-25,25) 9(25,-25) 10(25,25) 11(75,-25) 12(75,25) 13(125,-25) 14(125,25) 15(175,-25) 16(175,25)
  round 55.12 hole 55.12: MH1(-237.48,0) MH2(237.48,0)
  silkscreen extent -283,-130 283,130, body extent -262,-112 263,113, height 220
SSW-140-23-G-D [mm]
  rect 1.5x1.5 hole 0.92: 1(-49.53,-1.27) 3(-46.99,-1.27) 5(-44.45,-1.27) 7(-41.91,-1.27) 9(-39.37,-1.27) 11(-36.83,-1.27) 13(-34.29,-1.27) 15(-31.75,-1.27) 17(-29.21,-1.27) 19(-26.67,-1.27) 21(-24.13,-1.27) 23(-21.59,-1.27) 25(-19.05,-1.27) 27(-16.51,-1.27) 29(-13.97,-1.27) 31(-11.43,-1.27) 33(-8.89,-1.27) 35(-6.35,-1.27) 37(-3.81,-1.27) 39(-1.27,-1.27) 41(1.27,-1.27) 43(3.81,-1.27) 45(6.35,-1.27) 47(8.89,-1.27) 49(11.43,-1.27) 51(13.97,-1.27) 53(16.51,-1.27) 55(19.05,-1.27) 57(21.59,-1.27) 59(24.13,-1.27) 61(26.67,-1.27) 63(29.21,-1.27) 65(31.75,-1.27) 67(34.29,-1.27) 69(36.83,-1.27) 71(39.37,-1.27) 73(41.91,-1.27) 75(44.45,-1.27) 77(46.99,-1.27) 79(49.53,-1.27)
  round 1.5 hole 0.92: 2(-49.53,1.27) 4(-46.99,1.27) 6(-44.45,1.27) 8(-41.91,1.27) 10(-39.37,1.27) 12(-36.83,1.27) 14(-34.29,1.27) 16(-31.75,1.27) 18(-29.21,1.27) 20(-26.67,1.27) 22(-24.13,1.27) 24(-21.59,1.27) 26(-19.05,1.27) 28(-16.51,1.27) 30(-13.97,1.27) 32(-11.43,1.27) 34(-8.89,1.27) 36(-6.35,1.27) 38(-3.81,1.27) 40(-1.27,1.27) 42(1.27,1.27) 44(3.81,1.27) 46(6.35,1.27) 48(8.89,1.27) 50(11.43,1.27) 52(13.97,1.27) 54(16.51,1.27) 56(19.05,1.27) 58(21.59,1.27) 60(24.13,1.27) 62(26.67,1.27) 64(29.21,1.27) 66(31.75,1.27) 68(34.29,1.27) 70(36.83,1.27) 72(39.37,1.27) 74(41.91,1.27) 76(44.45,1.27) 78(46.99,1.27) 80(49.53,1.27)
  body extent -51.05,-2.48 51.05,2.48, height 8.51
"TFM-115-02-S-D-A - duplicate" [mm]
  rect 0.75x2.9 smd mask+0: 1(-8.89,-1.714) 2(-8.89,1.715) 3(-7.62,-1.714) 4(-7.62,1.715) 5(-6.35,-1.714) 6(-6.35,1.715) 7(-5.08,-1.714) 8(-5.08,1.715) 9(-3.81,-1.714) 10(-3.81,1.715) 11(-2.54,-1.714) 12(-2.54,1.715) 13(-1.27,-1.714) 14(-1.27,1.715) 15(0,-1.714) 16(0,1.715) 17(1.27,-1.714) 18(1.27,1.715) 19(2.54,-1.714) 20(2.54,1.715) 21(3.81,-1.714) 22(3.81,1.715) 23(5.08,-1.714) 24(5.08,1.715) 25(6.35,-1.714) 26(6.35,1.715) 27(7.62,-1.714) 28(7.62,1.715) 29(8.89,-1.714) 30(8.89,1.715)
  round 1 hole 1.35 unplated mask+0: 31(-10.477,0.076) 32(10.478,0)
  Keep-Out Layer pour cut-out: -9.494,0.076 -9.528,0.331 -9.626,0.568 -9.782,0.772 -9.986,0.928 -10.223,1.026 -10.478,1.06 -10.732,1.026 -10.969,0.928 -11.173,0.772 -11.329,0.568 -11.428,0.331 -11.461,0.076 -11.428,-0.178 -11.329,-0.415 -11.173,-0.619 -10.969,-0.775 -10.732,-0.874 -10.478,-0.907 -10.223,-0.874 -9.986,-0.775 -9.782,-0.619 -9.626,-0.415 -9.528,-0.178
  Keep-Out Layer pour cut-out: 11.461,0 11.428,0.255 11.329,0.492 11.173,0.695 10.969,0.852 10.732,0.95 10.478,0.983 10.223,0.95 9.986,0.852 9.782,0.695 9.626,0.492 9.528,0.255 9.494,0 9.528,-0.255 9.626,-0.492 9.782,-0.695 9.986,-0.852 10.223,-0.95 10.478,-0.983 10.732,-0.95 10.969,-0.852 11.173,-0.695 11.329,-0.492 11.428,-0.255
  silkscreen extent -11.1,-3.52 11.1,2.85
TSOP65P640X90-20N [mm] "TSOP, 20-Leads, Body 6.50x4.40mm, Pitch 0.65mm, IPC Medium Density"
  oval 1.4x0.35 smd: 1(-2.875,2.925) 2(-2.875,2.275) 3(-2.875,1.625) 4(-2.875,0.975) 5(-2.875,0.325) 6(-2.875,-0.325) 7(-2.875,-0.975) 8(-2.875,-1.625) 9(-2.875,-2.275) 10(-2.875,-2.925) 11(2.875,-2.925) 12(2.875,-2.275) 13(2.875,-1.625) 14(2.875,-0.975) 15(2.875,-0.325) 16(2.875,0.325) 17(2.875,0.975) 18(2.875,1.625) 19(2.875,2.275) 20(2.875,2.925)
  silkscreen extent -3,-3.3 1.85,3.77, body extent -2.25,-3.3 2.25,3.3, height 0.9

## Part data
C1 C2 C3 C6 C9 C11 C12 C16 C17 C18 C19: library part CMP-1036-02117-1, "CAP 150pF 16V ±10% 0805 (2012 Metric) Thickness 0.75mm SMD", Case-EIA=0805, Case-Metric=2012, Rated Voltage="16 V", Tolerance=±10%, Max Thickness="0.75 mm", Technology=SMT
C4 C5 C7 C8: library part CMP-1036-04752-1, "1µF ±5% 25V Ceramic Capacitor X7R 0805 (2012 Metric)", Capacitance=1uF, Case-EIA=0805, Case-Metric=2012, Dielectric=X7R, Manufacturer="Kyocera AVX", Max Operating Temperature=125°C, Min Operating Temperature=-55°C, Package Quantity=2000, Rated Voltage="25 V", Supplier Part Number 1=478-10487-1-ND, Tolerance=±5%, Voltage Rating=25V, Case/Package=0805, Case Code (Imperial)=0805, Case Code (Metric)=2012, ComponentLink1Description=https://datasheet.ciiva.com/221/cx7r-221690.pdf?src-supplier=Digi-Key, ComponentLink1URL=https://datasheet.ciiva.com/221/cx7r-221690.pdf?src-supplier=Digi-Key, ComponentLink2Description=https://datasheet.ciiva.com/5419/cx7r-218113-5419770.pdf?src-supplier=Mouser, ComponentLink2URL=https://datasheet.ciiva.com/5419/cx7r-218113-5419770.pdf?src-supplier=Mouser, ComponentLink3Description=https://datasheet.ciiva.com/28586/1679506-28586091.pdf?src-supplier=Element14, ComponentLink3URL=https://datasheet.ciiva.com/28586/1679506-28586091.pdf?src-supplier=Element14, ComponentLink4Description=https://datasheet.ciiva.com/11499/cx7r-11499836.pdf?src-supplier=Avnet, ComponentLink4URL=https://datasheet.ciiva.com/11499/cx7r-11499836.pdf?src-supplier=Avnet, Contact Plating=Tin, Depth=1.25mm, Height=1.4mm, Lead Free="Lead Free", Length=2.01mm, Manufacturer Part Number=08053C105JAT2A, Max Thickness="1.45 mm", Mount="Surface Mount", Number of Pins=2, Packaging="Tape and Reel", Pricing 1="1=0.44000, 10=0.30400, 100=0.18220, 500=0.13662, 1000=0.11537 (USD)", Radiation Hardening=No, REACH SVHC=Unknown, RoHS=Yes, Stock 1=13701, Supplier 1=Digi-Key, Technology=SMT, Termination=SMD/SMT, Thickness=0.037inch, Voltage Rating (DC)=25V, Width=0.049inch
C10: library part CMP-1036-02117-1, "0.1µF ±10% 25V Ceramic Capacitor X7R 0805 (2012 Metric)", Capacitance=100nF, Case/Package=0805, Case Code (Metric)=2012, Dielectric=X7R, Dielectric Material=Tantalum, Manufacturer=Vishay, Manufacturer Part Number=VJ0805Y104KXXCW1BC, Max Operating Temperature=125°C, Min Operating Temperature=-55°C, Package Quantity=4000, Supplier Part Number 1=720-1537-1-ND, Tolerance=10%, Voltage Rating=25V, Case Code (Imperial)=0805, ComponentLink1Description=https://datasheet.ciiva.com/11491/vjw1bcbascomseries-11491758.pdf?src-supplier=Avnet, ComponentLink1URL=https://datasheet.ciiva.com/11491/vjw1bcbascomseries-11491758.pdf?src-supplier=Avnet, ComponentLink2Description=https://datasheet.ciiva.com/176/vjw1bcbascomseries-176875.pdf?src-supplier=Digi-Key, ComponentLink2URL=https://datasheet.ciiva.com/176/vjw1bcbascomseries-176875.pdf?src-supplier=Digi-Key, Depth=1.25mm, Height=1.45mm, Lead Free="Lead Free", Length=2mm, Mount="Surface Mount", Number of Pins=2, Packaging="Tape and Reel", Pricing 1="1=0.26000, 10=0.17900, 100=0.10120, 500=0.07142, 1000=0.06250 (USD)", RoHS=Yes, Stock 1=72674, Supplier 1=Digi-Key, Termination=SMD/SMT, Thickness=0.037inch, Voltage Rating (DC)=25V, Weight=0.000194oz, Width=1.25mm
C13 C14: library part CMP-2007-03454-1, "2.2µF ±10% 10V Ceramic Capacitor X7R 0805 (2012 Metric)", Capacitance=2.2uF, Case/Package=0805, Case Code (Metric)=2012, Dielectric=X7R, Manufacturer=Murata, Max Operating Temperature=125°C, Min Operating Temperature=-55°C, Package Quantity=1, Supplier Part Number 1=490-1696-1-ND, Tolerance=10%, Voltage=10V, Case Code (Imperial)=0805, ComponentLink1Description=https://datasheet.ciiva.com/2989/product-2989712.pdf?src-supplier=Avnet, ComponentLink1URL=https://datasheet.ciiva.com/2989/product-2989712.pdf?src-supplier=Avnet, ComponentLink2Description=https://datasheet.ciiva.com/3778/grm21br71a225ka0123-3778504.pdf?src-supplier=Arrow, ComponentLink2URL=https://datasheet.ciiva.com/3778/grm21br71a225ka0123-3778504.pdf?src-supplier=Arrow, ComponentLink3Description=https://datasheet.ciiva.com/11786/0900766b80936815-11786251.pdf?src-supplier=RSComponents, ComponentLink3URL=https://datasheet.ciiva.com/11786/0900766b80936815-11786251.pdf?src-supplier=RSComponents, ComponentLink4Description=https://datasheet.ciiva.com/16203/product-16203815.pdf?src-supplier=Future+Electronics, ComponentLink4URL=https://datasheet.ciiva.com/16203/product-16203815.pdf?src-supplier=Future+Electronics, ComponentLink5Description=https://datasheet.ciiva.com/135/partnumbering-e-01-135064.pdf?src-supplier=Digi-Key, ComponentLink5URL=https://datasheet.ciiva.com/135/partnumbering-e-01-135064.pdf?src-supplier=Digi-Key, ComponentLink6Description=https://datasheet.ciiva.com/135/partnumbering-e-01-135065.pdf?src-supplier=Digi-Key, ComponentLink6URL=https://datasheet.ciiva.com/135/partnumbering-e-01-135065.pdf?src-supplier=Digi-Key, ComponentLink7Description=https://datasheet.ciiva.com/135/partnumbering-e-01-135066.pdf?src-supplier=Digi-Key, ComponentLink7URL=https://datasheet.ciiva.com/135/partnumbering-e-01-135066.pdf?src-supplier=Digi-Key, ComponentLink8Description=https://datasheet.ciiva.com/22703/608985-22703358.pdf?src-supplier=Element14, ComponentLink8URL=https://datasheet.ciiva.com/22703/608985-22703358.pdf?src-supplier=Element14, ComponentLink9Description=https://datasheet.ciiva.com/2989/product-2989711.pdf?src-supplier=Avnet, ComponentLink9URL=https://datasheet.ciiva.com/2989/product-2989711.pdf?src-supplier=Avnet, Depth=1.25mm, Dissipation Factor=0.035%, Height=1.25mm, Lead Free="Lead Free", Length=2mm, Manufacturer Part Number=GRM21BR71A225KA01L, Mount="Surface Mount", Number of Pins=2, Packaging="Tape and Reel", Part Number=GRM21BR71A225KA01L, Pricing 1="1=0.27000, 10=0.18600, 100=0.09440, 500=0.06458, 1000=0.05713 (USD)", Radiation Hardening=No, REACH SVHC="No SVHC", RoHS=Yes, Stock 1=271684, Supplier 1=Digi-Key, Termination=SMD/SMT, Thickness=0.053inch, Voltage Rating=10V, Voltage Rating (DC)=10V, Width=1.25mm
C15: library part CMP-2007-04770-1, "10000pF ±10% 10V Ceramic Capacitor X7R 0805 (2012 Metric)", Capacitance=10nF, Case/Package=0805, Case Code (Metric)=2012, Dielectric=X7R, Manufacturer="AVX Interconnect / Elco", Max Operating Temperature=125°C, Min Operating Temperature=-55°C, Package Quantity=4000, Supplier Part Number 1=478-11396-1-ND, Tolerance=10%, Voltage Rating=10V, Case Code (Imperial)=0805, ComponentLink1Description=https://datasheet.ciiva.com/205/cx7r-205251.pdf?src-supplier=Digi-Key, ComponentLink1URL=https://datasheet.ciiva.com/205/cx7r-205251.pdf?src-supplier=Digi-Key, ComponentLink2Description=https://datasheet.ciiva.com/11508/cx7r-11508056.pdf?src-supplier=Avnet, ComponentLink2URL=https://datasheet.ciiva.com/11508/cx7r-11508056.pdf?src-supplier=Avnet, ComponentLink3Description=https://datasheet.ciiva.com/17489/cx7r-17489036.pdf?src-supplier=Avnet+Europe, ComponentLink3URL=https://datasheet.ciiva.com/17489/cx7r-17489036.pdf?src-supplier=Avnet+Europe, ComponentLink4Description=https://datasheet.ciiva.com/5420/cx7r-5420079.pdf?src-supplier=Mouser, ComponentLink4URL=https://datasheet.ciiva.com/5420/cx7r-5420079.pdf?src-supplier=Mouser, Depth=1.25mm, Length=2.01mm, Manufacturer Part Number=0805ZC103KAT2A, Mount="Surface Mount", Number of Pins=2, Packaging="Tape and Reel", Part Number=0805ZC103KAT2A, Pricing 1="1=0.32000, 10=0.21700, 100=0.11010, 500=0.07534, 1000=0.06665 (USD)", Radiation Hardening=No, REACH SVHC=Unknown, RoHS=Yes, Stock 1=11980, Supplier 1=Digi-Key, Termination=SMD/SMT, Thickness=0.037inch, Voltage Rating (DC)=10V, Width=0.049inch
CN1 CN2: "80 Position Receptacle Connector Through Hole", Manufacturer=Samtec, ComponentLink1Description=http://www.samtec.com/documents/webfiles/pdf/SSQ_TH.PDF?src-supplier=Avnet, ComponentLink1URL=http://www.samtec.com/documents/webfiles/pdf/SSQ_TH.PDF?src-supplier=Avnet, Contact Plating=Gold, Gender=Female, Manufacturer Part Number=SSW-140-23-G-D, Mount="Through Hole", Number of Contacts=80, Number of Rows=2, Packaging=Bulk, Pitch=2.54mm, Pricing 1="1=13.99000, 10=13.29000, 25=12.59000, 50=12.09000, 100=11.29000 (USD)", Radiation Hardening=No, RoHS=Yes, Stock 1=0, Supplier 1=Avnet, Supplier Part Number 1=SSW-140-23-G-D, Termination=Solder
DS1 DS2 DS3 DS4 DS5: library part "LED A/K", Case/Package=0805, Case Code (Metric)=2012, Colour=Red, Forward Current=20mA, Forward Voltage=2V, Lens Colour=Colorless, Manufacturer="Vishay / Lite-On", Manufacturer Part Number=LTST-S220KRKT, Max Operating Temperature=85°C, Min Operating Temperature=-55°C, Package Quantity=4000, Power Dissipation=75mW, Supplier Part Number 1=160-1469-1-ND, Case Code (Imperial)=0805, ComponentLink1Description=https://datasheet.ciiva.com/2110/s-110-ltst-s220krkt-2110132.pdf, ComponentLink1URL=https://datasheet.ciiva.com/2110/s-110-ltst-s220krkt-2110132.pdf, ComponentLink2Description=https://datasheet.ciiva.com/2110/s-110-ltst-s220krkt-2110133.pdf, ComponentLink2URL=https://datasheet.ciiva.com/2110/s-110-ltst-s220krkt-2110133.pdf, ComponentLink3Description=https://datasheet.ciiva.com/2110/s-110-ltst-s220krkt-2110134.pdf, ComponentLink3URL=https://datasheet.ciiva.com/2110/s-110-ltst-s220krkt-2110134.pdf, ComponentLink4Description=https://datasheet.ciiva.com/12403/lite-on-ltst-s220krkt-187389-12403798.pdf, ComponentLink4URL=https://datasheet.ciiva.com/12403/lite-on-ltst-s220krkt-187389-12403798.pdf, ComponentLink5Description=https://datasheet.ciiva.com/16345/lite-onltst-s220krkt-16345511.pdf, ComponentLink5URL=https://datasheet.ciiva.com/16345/lite-onltst-s220krkt-16345511.pdf, ComponentLink6Description=https://datasheet.ciiva.com/15118/getdatasheetpartid-225752-15118120.pdf, ComponentLink6URL=https://datasheet.ciiva.com/15118/getdatasheetpartid-225752-15118120.pdf, ComponentLink7Description=https://datasheet.ciiva.com/14633/0900766b80dc0b76-14633737.pdf, ComponentLink7URL=https://datasheet.ciiva.com/14633/0900766b80dc0b76-14633737.pdf, ComponentLink8Description=https://datasheet.ciiva.com/11775/0900766b80dc0b76-11775439.pdf, ComponentLink8URL=https://datasheet.ciiva.com/11775/0900766b80dc0b76-11775439.pdf, Depth=0.6mm, Dominant Wavelength=631nm, Height=0.6mm, Illumination Colour=Red, Lead Free="Lead Free", Length=2.1mm, Lens Style=Diffused,Colorless, Lens Transparency=Clear, Luminous Intensity=54mcd, Mount="Surface Mount", Number of Elements=1, Number of LEDs=1, Number of Pins=2, Packaging="Tape and Reel", Power Rating=75mW, Pricing 1="1=0.31, 10=0.225, 25=0.1656, 100=0.1183, 250=0.0804, 500=0.071, 1000=0.0556 (USD)", Radiation Hardening=No, Stock 1=108191, Supplier 1=Digi-Key, Test Current=20mA, Viewing Angle=130°, Wavelength=639nm, Width=1mm
P2: library part "Header 15X2H", "Header, 15-Pin, Dual row, Right Angle", Current Rating=2A, Housing Color=Black, Manufacturer=Samtec, Max Operating Temperature=125°C, Max Voltage Rating (AC)=350V, Min Operating Temperature=-55°C, Supplier Part Number 1=SAM10140-ND, ComponentLink1Description=https://datasheet.ciiva.com/23730/tfm-1xx-xx-xxx-x-xxx-mkt-23730881.pdf?src-supplier=Newark, ComponentLink1URL=https://datasheet.ciiva.com/23730/tfm-1xx-xx-xxx-x-xxx-mkt-23730881.pdf?src-supplier=Newark, ComponentLink2Description=https://datasheet.ciiva.com/11748/0900766b803e8a8f-11748828.pdf?src-supplier=RSComponents, ComponentLink2URL=https://datasheet.ciiva.com/11748/0900766b803e8a8f-11748828.pdf?src-supplier=RSComponents, ComponentLink3Description=https://datasheet.ciiva.com/22665/1909334-22665886.pdf?src-supplier=Element14, ComponentLink3URL=https://datasheet.ciiva.com/22665/1909334-22665886.pdf?src-supplier=Element14, Contact Material=Bronze, Contact Plating=Gold, Depth=5.72mm, Gender=Male, Housing Material=Polymer, LatestRevisionDate=17-Jul-2002, LatestRevisionNote="Re-released for DXP Platform.", Length=22.23mm, Manufacturer Part Number=TFM-115-02-S-D-A, Number of Contacts=30, Number of Rows=2, Orientation=Straight, Packaging=Bulk, Pitch=1.27mm, Pricing 1="1=6.02000, 26=5.27115, 104=4.76904, 520=4.01600, 1014=3.51400 (USD)", Publisher="Altium Limited", Radiation Hardening=No, REACH SVHC="No SVHC", RoHS=Yes, Stock 1=262, Supplier 1=Digi-Key, Termination=Solder, Voltage Rating=350V
Q1 Q2 Q3 Q4 Q5: "P-Channel 40 V 0.025 Ohm 39 W Surface Mount Power Mosfet - PowerPAK-1212-8", Continuous Drain Current (ID)=9.3A, Drain to Source Breakdown Voltage=-40V, Drain to Source Resistance=25mR, Drain to Source Voltage (Vdss)=40V, Gate to Source Voltage (Vgs)=20V, Input Capacitance=1.98nF, Manufacturer="Vishay Siliconix", Max Operating Temperature=150°C, Max Power Dissipation=39W, Min Operating Temperature=-50°C, Package="PowerPAK®-1212 Vishay", Package Quantity=3000, Power Dissipation=3.7W, Supplier Part Number 1=SI7611DN-T1-GE3CT-ND, Threshold Voltage=-1V, ComponentLink1Description=https://datasheet.ciiva.com/16217/si7611dn-16217425.pdf?src-supplier=Future+Electronics, ComponentLink1URL=https://datasheet.ciiva.com/16217/si7611dn-16217425.pdf?src-supplier=Future+Electronics, ComponentLink2Description=https://datasheet.ciiva.com/22652/1719651-22652413.pdf?src-supplier=Element14, ComponentLink2URL=https://datasheet.ciiva.com/22652/1719651-22652413.pdf?src-supplier=Element14, ComponentLink3Description=https://datasheet.ciiva.com/4441/si7611dn-244617-4441134.pdf?src-supplier=Mouser, ComponentLink3URL=https://datasheet.ciiva.com/4441/si7611dn-244617-4441134.pdf?src-supplier=Mouser, ComponentLink4Description=https://datasheet.ciiva.com/26791/si7611dn-t1-ge3-26791896.pdf?src-supplier=IIIC, ComponentLink4URL=https://datasheet.ciiva.com/26791/si7611dn-t1-ge3-26791896.pdf?src-supplier=IIIC, ComponentLink5Description=https://datasheet.ciiva.com/933/si7611dn-933572.pdf?src-supplier=Digi-Key, ComponentLink5URL=https://datasheet.ciiva.com/933/si7611dn-933572.pdf?src-supplier=Digi-Key, ComponentLink6Description=https://datasheet.ciiva.com/933/si7611dn-933574.pdf?src-supplier=Digi-Key, ComponentLink6URL=https://datasheet.ciiva.com/933/si7611dn-933574.pdf?src-supplier=Digi-Key, ComponentLink7Description=https://datasheet.ciiva.com/22671/si7611dn-22671641.pdf?src-supplier=Element14, ComponentLink7URL=https://datasheet.ciiva.com/22671/si7611dn-22671641.pdf?src-supplier=Element14, ComponentLink8Description=https://datasheet.ciiva.com/933/si7611dn-933573.pdf?src-supplier=Digi-Key, ComponentLink8URL=https://datasheet.ciiva.com/933/si7611dn-933573.pdf?src-supplier=Digi-Key, ComponentLink9Description=https://datasheet.ciiva.com/11159/si7611dn-11159816.pdf?src-supplier=Avnet, ComponentLink9URL=https://datasheet.ciiva.com/11159/si7611dn-11159816.pdf?src-supplier=Avnet, Digi-Key_Part_Number=SI7611DN-T1-GE3CT-ND, Digi-Key_Purchase_URL=https://www.digikey.com/product-detail/en/vishay-siliconix/SI7611DN-T1-GE3/SI7611DN-T1-GE3CT-ND/1978912?utm_source=snapeda&utm_medium=aggregator&utm_campaign=symbol, Fall Time=9ns, Height=1.04mm, Lead Free="Lead Free", Length=3.05mm, Manufacturer Part Number=SI7611DN-T1-GE3, MF="Vishay Siliconix", Mount="Surface Mount", MP=SI7611DN-T1-GE3, Nominal Vgs=-3V, Number of Channels=1, Number of Elements=1, Number of Pins=8, On-State Resistance=25mR, Packaging="Tape and Reel", Pricing 1="1=1.69000, 10=1.51900, 100=1.22090, 500=1.00310, 1000=0.83113 (USD)", Radiation Hardening=No, Rds On Max=25mR, REACH SVHC=Unknown, Rise Time=11ns, RoHS=Yes, SnapEDA_Link=https://www.snapeda.com/parts/SI7611DN-T1-GE3/Vishay%20Siliconix/view-part/?ref=snap, Stock 1=17511, Supplier 1=Digi-Key, Turn-Off Delay Time=30ns, Turn-On Delay Time=10ns, Width=3.05mm
R1 R2 R7 R8 R12: library part CMP-1013-00393-1, Manufacturer="Vishay Dale", Manufacturer Part Number=CRCW08054K99FKEA, Operating Temperature="-55°C ~ 155°C", Package / Case="0805 (2012 Metric)", Power (Watts)="0.125W, 1/8W", Resistance (Ohms)=4.99k, Supplier Device Package=0805, Supplier Part Number 1=541-4.99KCCT-ND, Temperature Coefficient=±100ppm/°C, Tolerance=±1%, Category=Resistors, ComponentLink1Description=http://www.vishay.com/docs/20035/dcrcwe3.pdf, ComponentLink1URL=http://www.vishay.com/docs/20035/dcrcwe3.pdf, Composition="Thick Film", Failure Rate=-, Features="Automotive AEC-Q200", Height - Seated (Max)="0.020\" (0.50mm)", Packaging="Cut Tape (CT)", Part Status=Active, Pricing 1="1=0.1, 10=0.044, 100=0.0178, 1000=0.00802, 2500=0.00696 (USD)", RoHS="RoHS Compliant", Size / Dimension="0.079\" L x 0.049\" W (2.00mm x 1.25mm)", Stock 1=93740, Supplier 1=Digi-Key
R3 R6 R11 R14 R15 R18 R20: library part CMP-1013-00606-1, "6K98 0.125W 1% 0805 (2012 Metric)  SMD", Manufacturer="Vishay Dale", Manufacturer Part Number=CRCW08056K98FKEA, Operating Temperature="-55°C ~ 155°C", Package / Case="0805 (2012 Metric)", Power (Watts)="0.125W, 1/8W", Resistance (Ohms)=6.98k, Supplier Device Package=0805, Supplier Part Number 1=541-6.98KCCT-ND, Temperature Coefficient=±100ppm/°C, Tolerance=±1%, Category=Resistors, ComponentLink1Description=http://www.vishay.com/docs/20035/dcrcwe3.pdf, ComponentLink1URL=http://www.vishay.com/docs/20035/dcrcwe3.pdf, Composition="Thick Film", Failure Rate=-, Features="Automotive AEC-Q200", Height - Seated (Max)="0.020\" (0.50mm)", Packaging="Cut Tape (CT)", Part Status=Active, Pricing 1="1=0.1, 10=0.044, 100=0.0178, 1000=0.00802, 2500=0.00696 (USD)", RoHS="RoHS Compliant", Size / Dimension="0.079\" L x 0.049\" W (2.00mm x 1.25mm)", Stock 1=34245, Supplier 1=Digi-Key
R4 R5 R9 R10 R16: library part CMP-1013-00393-1, Manufacturer="Vishay Dale", Manufacturer Part Number=CRCW080575R0FKEA, Operating Temperature="-55°C ~ 155°C", Package / Case="0805 (2012 Metric)", Power (Watts)="0.125W, 1/8W", Resistance (Ohms)=75, Supplier Device Package=0805, Supplier Part Number 1=541-75.0CCT-ND, Temperature Coefficient=±100ppm/°C, Tolerance=±1%, Category=Resistors, ComponentLink1Description=http://www.vishay.com/docs/20035/dcrcwe3.pdf, ComponentLink1URL=http://www.vishay.com/docs/20035/dcrcwe3.pdf, Composition="Thick Film", Failure Rate=-, Features="Automotive AEC-Q200", Height - Seated (Max)="0.020\" (0.50mm)", Packaging="Cut Tape (CT)", Part Status=Active, Pricing 1="1=0.1, 10=0.044, 100=0.0178, 1000=0.00802, 2500=0.00696 (USD)", RoHS="RoHS Compliant", Size / Dimension="0.079\" L x 0.049\" W (2.00mm x 1.25mm)", Stock 1=32546, Supplier 1=Digi-Key
R21 R22 R23 R24: library part CMP-1013-00215-1, "2R55 0.125W 1% 0805 (2012 Metric)  SMD", Case-EIA=0805, Case-Metric=2012, Power="0.125 W", Tolerance="1 %", Technology=SMT
U1: library part CMP-0440-01131-3, "High Speed CMOS Logic Hex Non-Inverting Buffers, PW0016A, LARGE T&R", Case/Package=TSSOP, F @ Nom Voltage(Max)(Mhz)=28, Generic Part Number=CD74HC4050, High Level Output Current=-5.2mA, ICC @ Nom Voltage(Max)(mA)=0.02, Low Level Output Current=5.2mA, Manufacturer="Texas Instruments", Max Operating Temperature=125°C, Max Supply Voltage=6V, Min Operating Temperature=-55°C, Min Supply Voltage=2V, Operating Temperature Range(C)="-55 to 125", Package Quantity=2000, Quiescent Current=2uA, Rating=Catalog, Supplier Part Number 1=296-9215-1-ND, tpd @ Nom Voltage(Max)(ns)=18, Voltage(Nom)(V)=6, Bits(#)=6, Code_JEDEC=MO-153, ComponentLink1Description=https://datasheet.ciiva.com/46415/1847357-46415243.pdf?src-supplier=Element14, ComponentLink1URL=https://datasheet.ciiva.com/46415/1847357-46415243.pdf?src-supplier=Element14, ComponentLink2Description=https://datasheet.ciiva.com/26248/cd74hc4049-26248317.pdf?src-supplier=Avnet+Europe, ComponentLink2URL=https://datasheet.ciiva.com/26248/cd74hc4049-26248317.pdf?src-supplier=Avnet+Europe, ComponentLink3Description=https://datasheet.ciiva.com/1834/cd74hc4049-1834062.pdf?src-supplier=Digi-Key, ComponentLink3URL=https://datasheet.ciiva.com/1834/cd74hc4049-1834062.pdf?src-supplier=Digi-Key, ComponentLink4Description=https://datasheet.ciiva.com/1834/cd74hc4049-1834063.pdf?src-supplier=Digi-Key, ComponentLink4URL=https://datasheet.ciiva.com/1834/cd74hc4049-1834063.pdf?src-supplier=Digi-Key, ComponentLink5Description=https://datasheet.ciiva.com/14302/schs205i-14302309.pdf?src-supplier=Avnet, ComponentLink5URL=https://datasheet.ciiva.com/14302/schs205i-14302309.pdf?src-supplier=Avnet, ComponentLink6Description=https://datasheet.ciiva.com/1834/cd74hc4049-1834061.pdf?src-supplier=Digi-Key, ComponentLink6URL=https://datasheet.ciiva.com/1834/cd74hc4049-1834061.pdf?src-supplier=Digi-Key, ComponentLink7Description=https://datasheet.ciiva.com/41455/001015781-da-01-en-ic-buffer-hex-cd74hc4050pwr-tssop-16-tid-41455717.pdf?src-supplier=Conrad, ComponentLink7URL=https://datasheet.ciiva.com/41455/001015781-da-01-en-ic-buffer-hex-cd74hc4050pwr-tssop-16-tid-41455717.pdf?src-supplier=Conrad, Contact Plating=Gold, DatasheetVersion=SCHS205I, Height=1.15mm, Input Type=CMOS, Lead Free="Lead Free", Length=5mm, Logic Function=Buffer, Manufacturer Part Number=CD74HC4050PWR, Mount="Surface Mount", Number of Bits=6, Number of Bits per Element=1, Number of Channels=6, Number of Elements=6, Number of Input Lines=6, Number of Inputs=6, Number of Output Lines=6, Number of Outputs=6, Number of Pins=16, Output Type=CMOS, PackageReference=PW0016A, PackageVersion=http://www.ti.com/lit/ml/mpds361/mpds361.pdf, Packaging="Tape and Reel", Polarity=Non-Inverting, Pricing 1="1=0.45000, 10=0.38600, 100=0.28840, 500=0.22660, 1000=0.17510 (USD)", Propagation Delay=14ns, Radiation Hardening=No, REACH SVHC="No SVHC", RoHS=Yes, Stock 1=16059, Supplier 1=Digi-Key, Turn-On Delay Time=14ns, VCC(Max)(V)=6, VCC(Min)(V)=2, Width=4.4mm
U2: "IC SWITCH QUAD SPDT 20TSSOP", Case/Package=TSSOP, Dual Supply Voltage=15V, Manufacturer=Maxim, Manufacturer Part Number=MAX333AEUP+, Max Dual Supply Voltage=20V, Max Operating Temperature=85°C, Max Power Dissipation=559mW, Max Supply Current=250uA, Max Supply Voltage=30V, Min Dual Supply Voltage=4.5V, Min Operating Temperature=-40°C, Min Supply Voltage=10V, On-State Resistance=35R, Operating Supply Current=1uA, Package Quantity=74, Supplier Part Number 1=700-MAX333AEUP, ComponentLink1Description=https://datasheet.ciiva.com/2978/max333a-2978850.pdf, ComponentLink1URL=https://datasheet.ciiva.com/2978/max333a-2978850.pdf, ComponentLink2Description=https://datasheet.ciiva.com/30478/0900766b81253c85-30478260.pdf, ComponentLink2URL=https://datasheet.ciiva.com/30478/0900766b81253c85-30478260.pdf, ComponentLink3Description=https://datasheet.ciiva.com/1674/max333a-1674617.pdf, ComponentLink3URL=https://datasheet.ciiva.com/1674/max333a-1674617.pdf, ComponentLink4Description=https://datasheet.ciiva.com/26825/max333aeup-26825546.pdf, ComponentLink4URL=https://datasheet.ciiva.com/26825/max333aeup-26825546.pdf, Height=0.95mm, Lead Free="Lead Free", Length=6.6mm, Number of Bits=4, Number of Channels=4, Number of Pins=20, Packaging=Rail/Tube, Pricing 1="1=6.77, 10=6.43, 50=5.8, 100=5.8, 1000=5.62, 10000=5.62 (USD)", Radiation Hardening=No, REACH SVHC=Unknown, Stock 1=664, Supplier 1=Mouser, Supply Type=Single,Dual, Throw Configuration=SPDT, Turn-Off Delay Time=145ns, Turn-On Delay Time=175ns, Weight=0.006737oz, Width=4.5mm
U3 U4 U8 U11: library part CMP-0809-00005-2, "Precision, Low Noise, Rail-to-Rail Output, Zero-Drift Operational Amplifier, 4 to 36 V, -40 to 125 degC, 5-pin SOT23 (DBV5), Green (RoHS & no Sb/Br)", Manufacturer="Texas Instruments", Rating=Catalog, Total Supply Voltage(Max)(+5V is 5, +/-5V is 10)=36, Total Supply Voltage(Min)(+5V is 5, +/-5V is 10)=4, CMRR(Min)(dB)=120, Code_JEDEC=MO-178, ComponentLink1Description="Manufacturer URL", ComponentLink1URL=http://www.ti.com/, ComponentLink2Description=Datasheet, ComponentLink2URL=http://www.ti.com/lit/ds/symlink/opa188.pdf, ComponentLink3Description="Package Specification", ComponentLink3URL=http://www.ti.com/litv/pdf/mpds018i, DatasheetVersion=SBOS642A, Eco-Plan="Green (RoHS & no Sb/Br)", GBW(Typ)(MHz)=2, Iq per channel(Max)(mA)=0.51, Mounting Technology="Surface Mount", Number of Channels=1, Offset Drift(Typ)(uV/C)=0.03, PackageDescription="5-Pin Plastic Small Outline, Body 1.6 x 2.9 mm, Pitch 0.95 mm", PackageReference=DBV0005A, PackageVersion="4073253-4/K, 03/2006", PartNumber=OPA188AIDBVR, Slew Rate(Typ)(V/us)=0.8, SubFamily="Zero Drift Precision Amplifier"